# Altium PCB trailGuard.PcbDoc
Units mm, origin at the board's own origin, x right, y up, seen from the top; angles counter-clockwise.
Board outline 59.99 x 65.09 mm, 2 copper layers (Top Layer, Bottom Layer), stack 1.1 mm thick; 41 components, 36 nets, 159 pads, 55 vias.
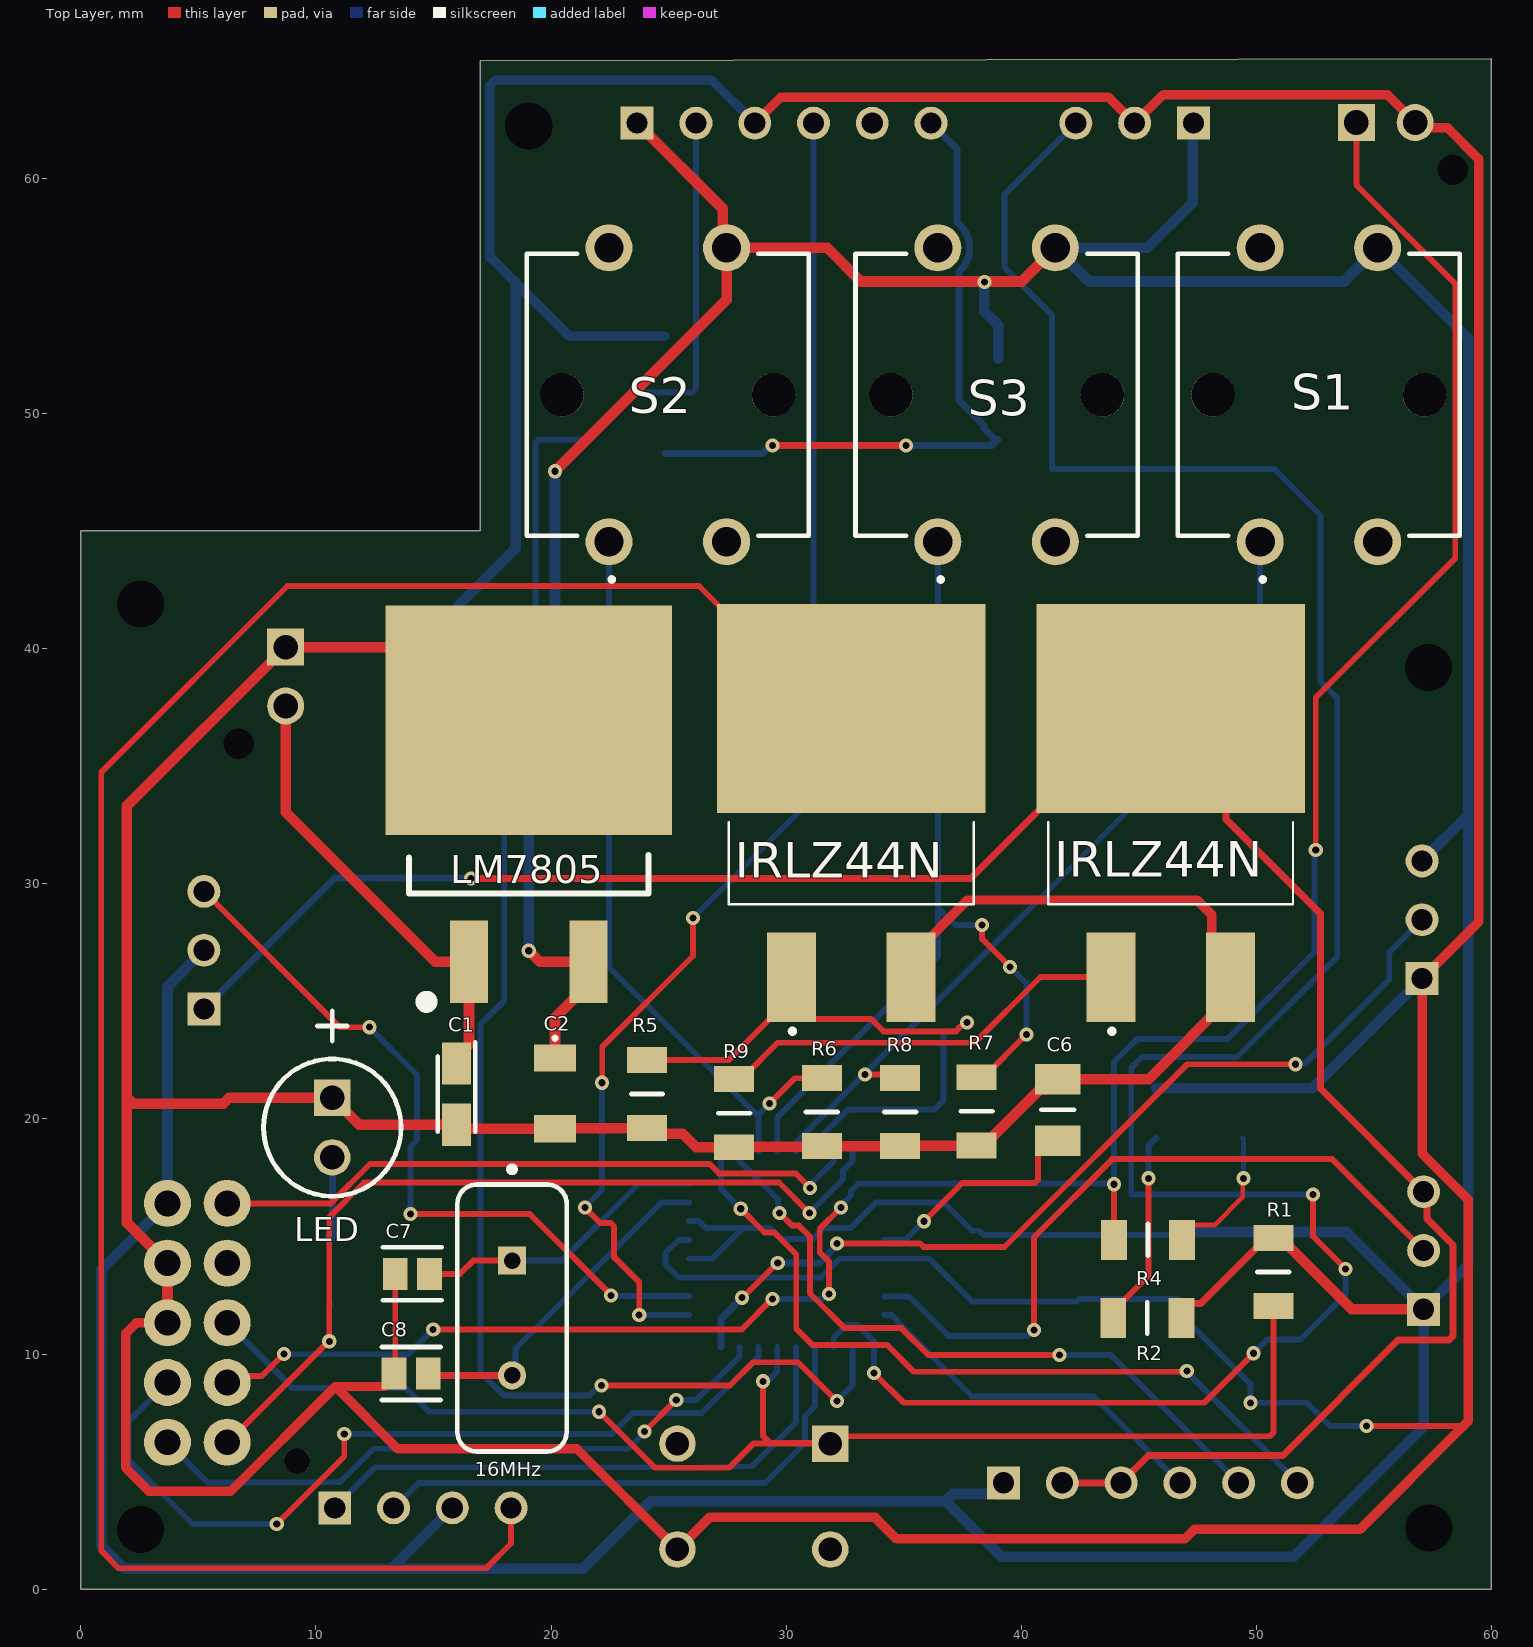
[diagram p0: Top Layer view]
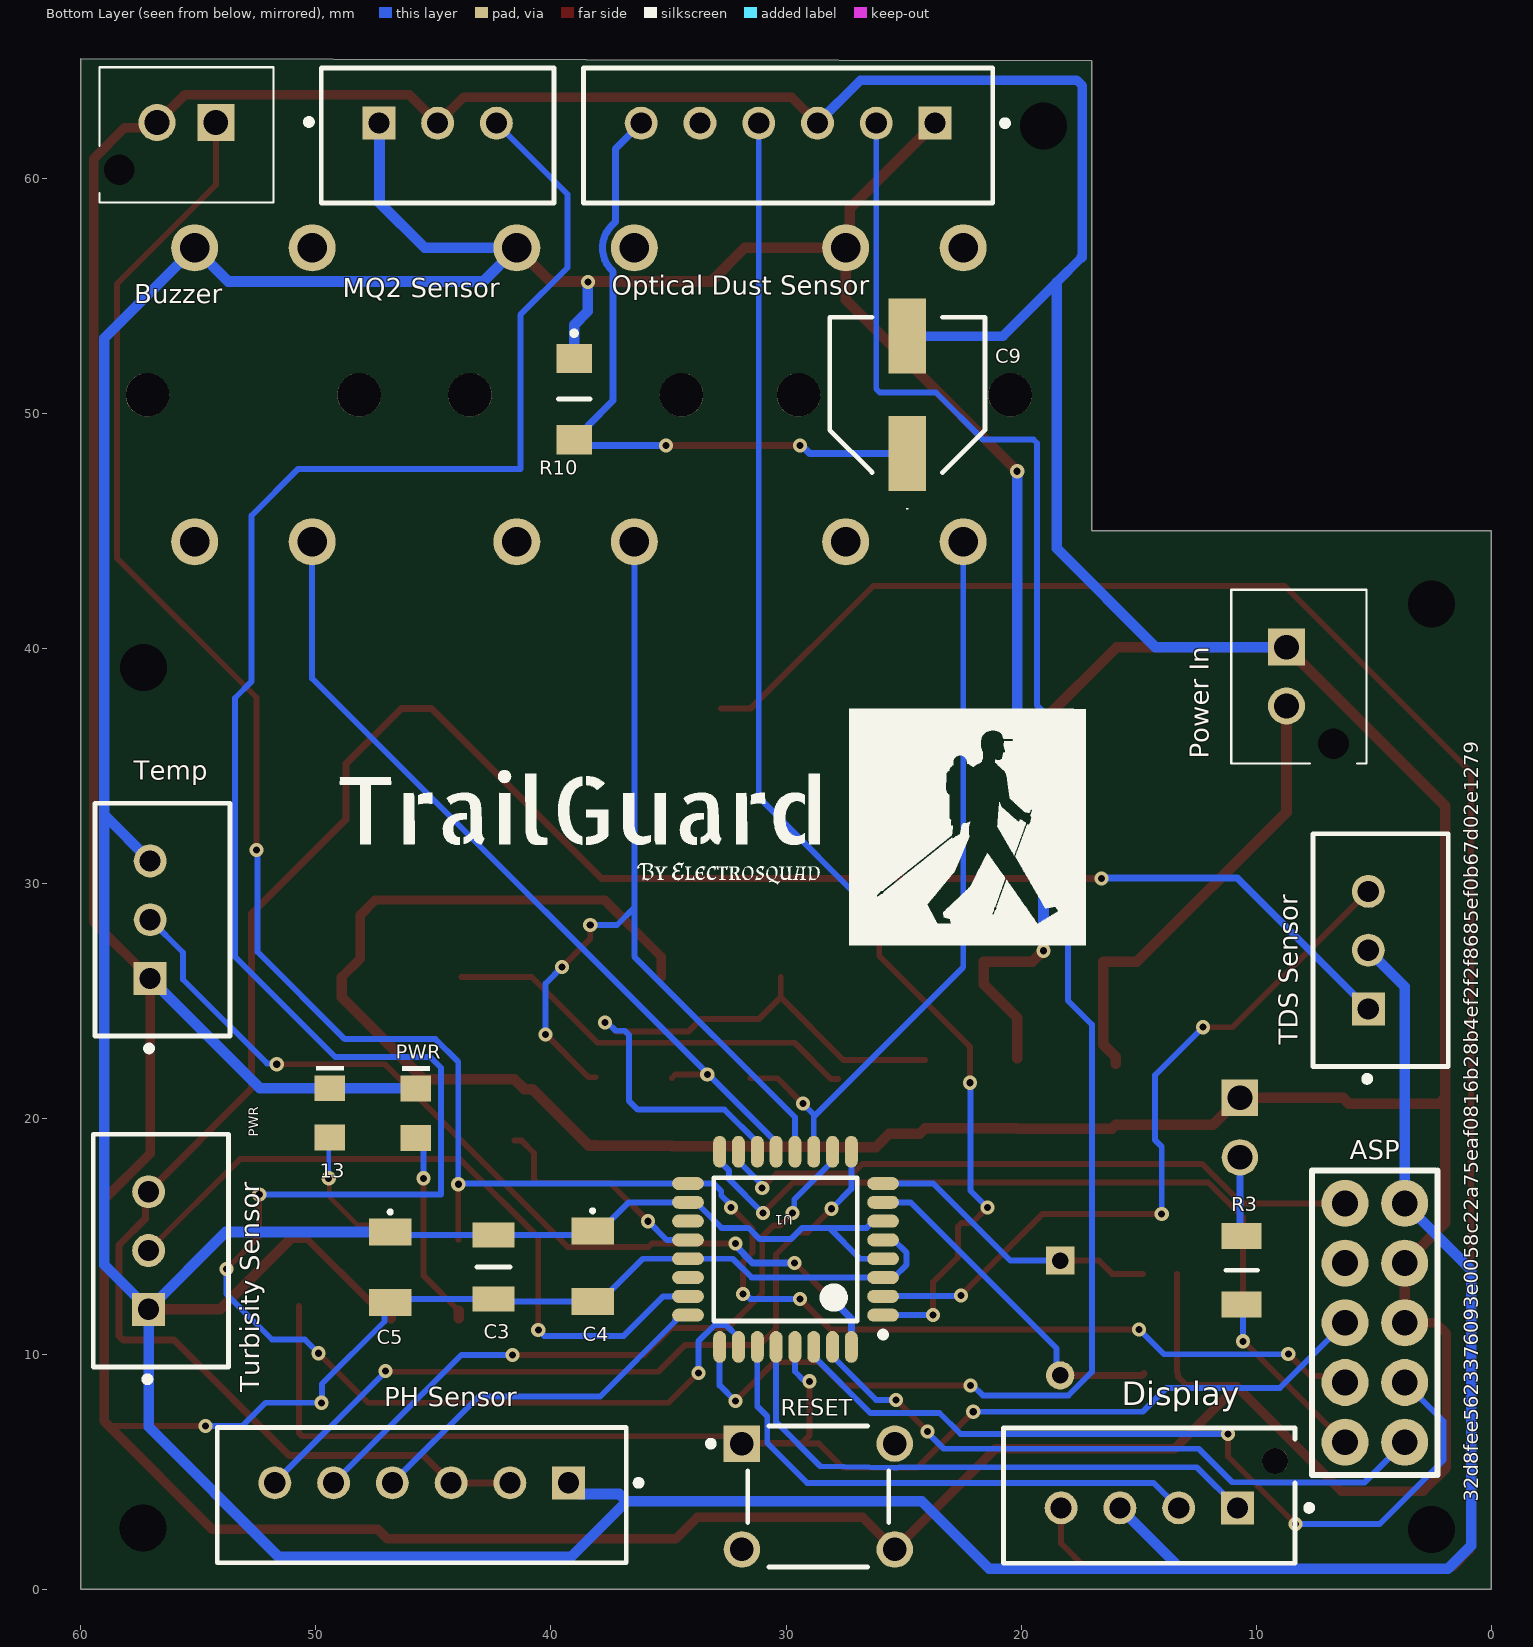
[diagram p1: Bottom Layer view, seen from below]
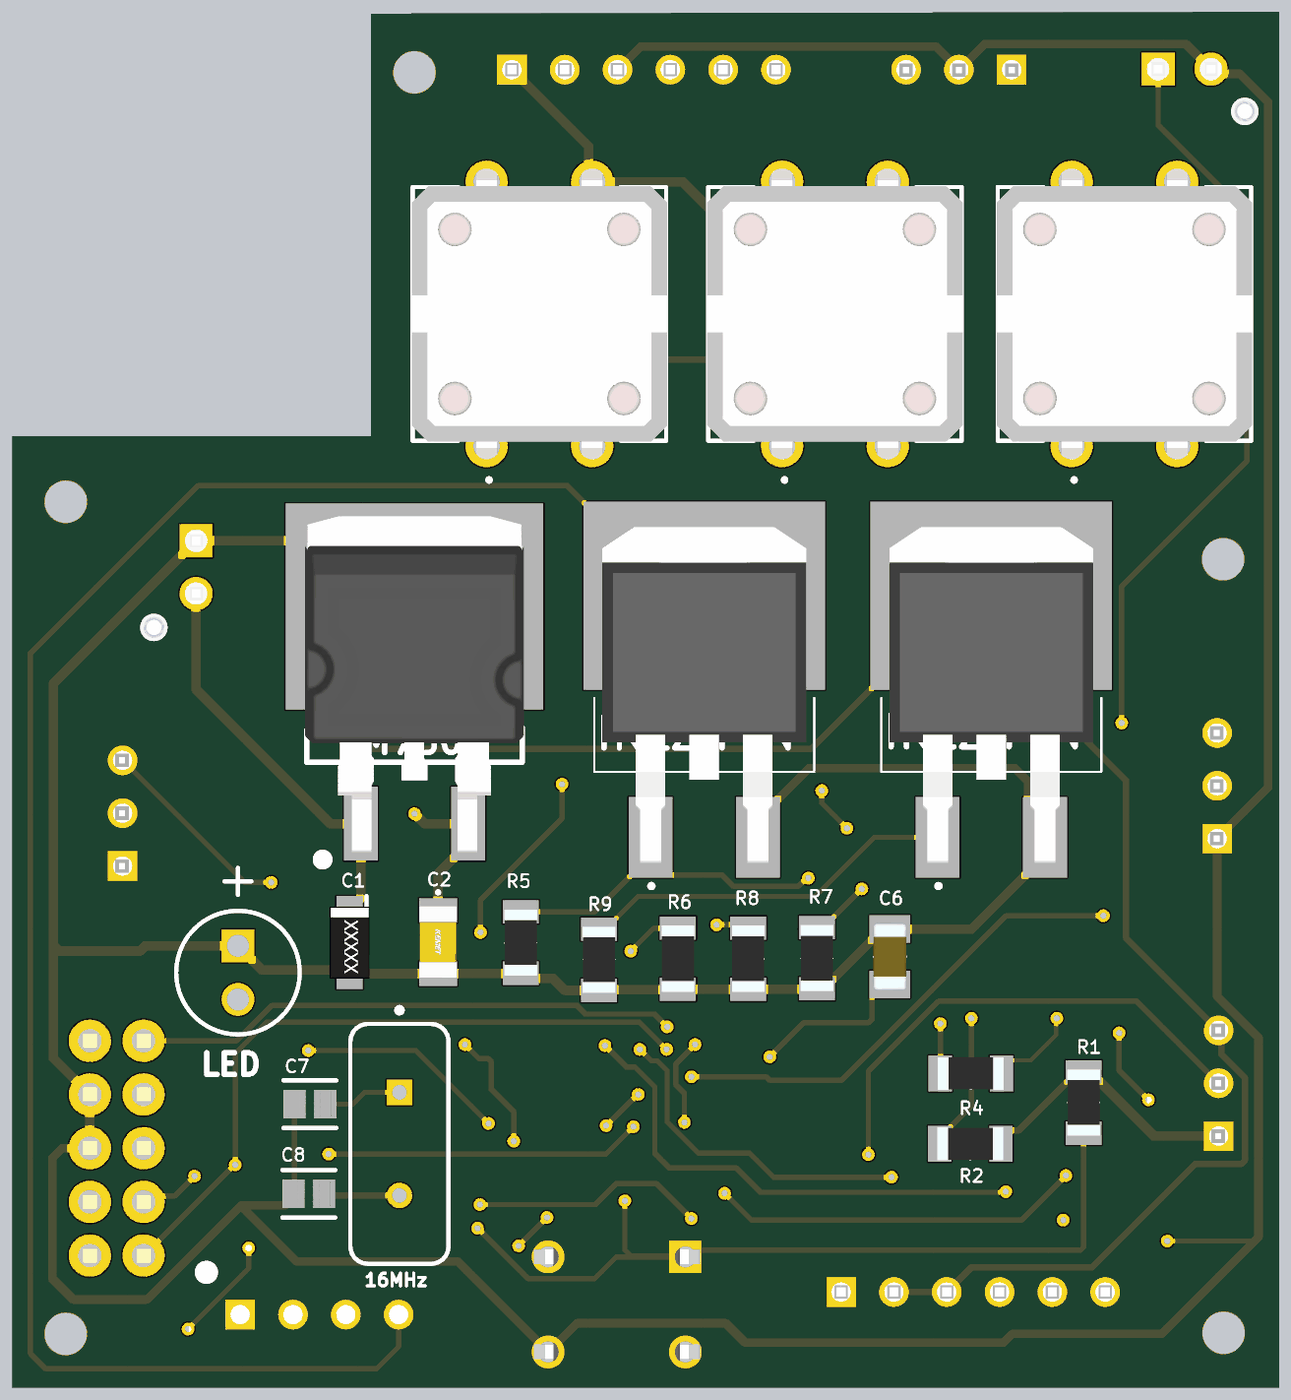
[diagram p2: 3D render of the assembled board from above, using the file's embedded part models]
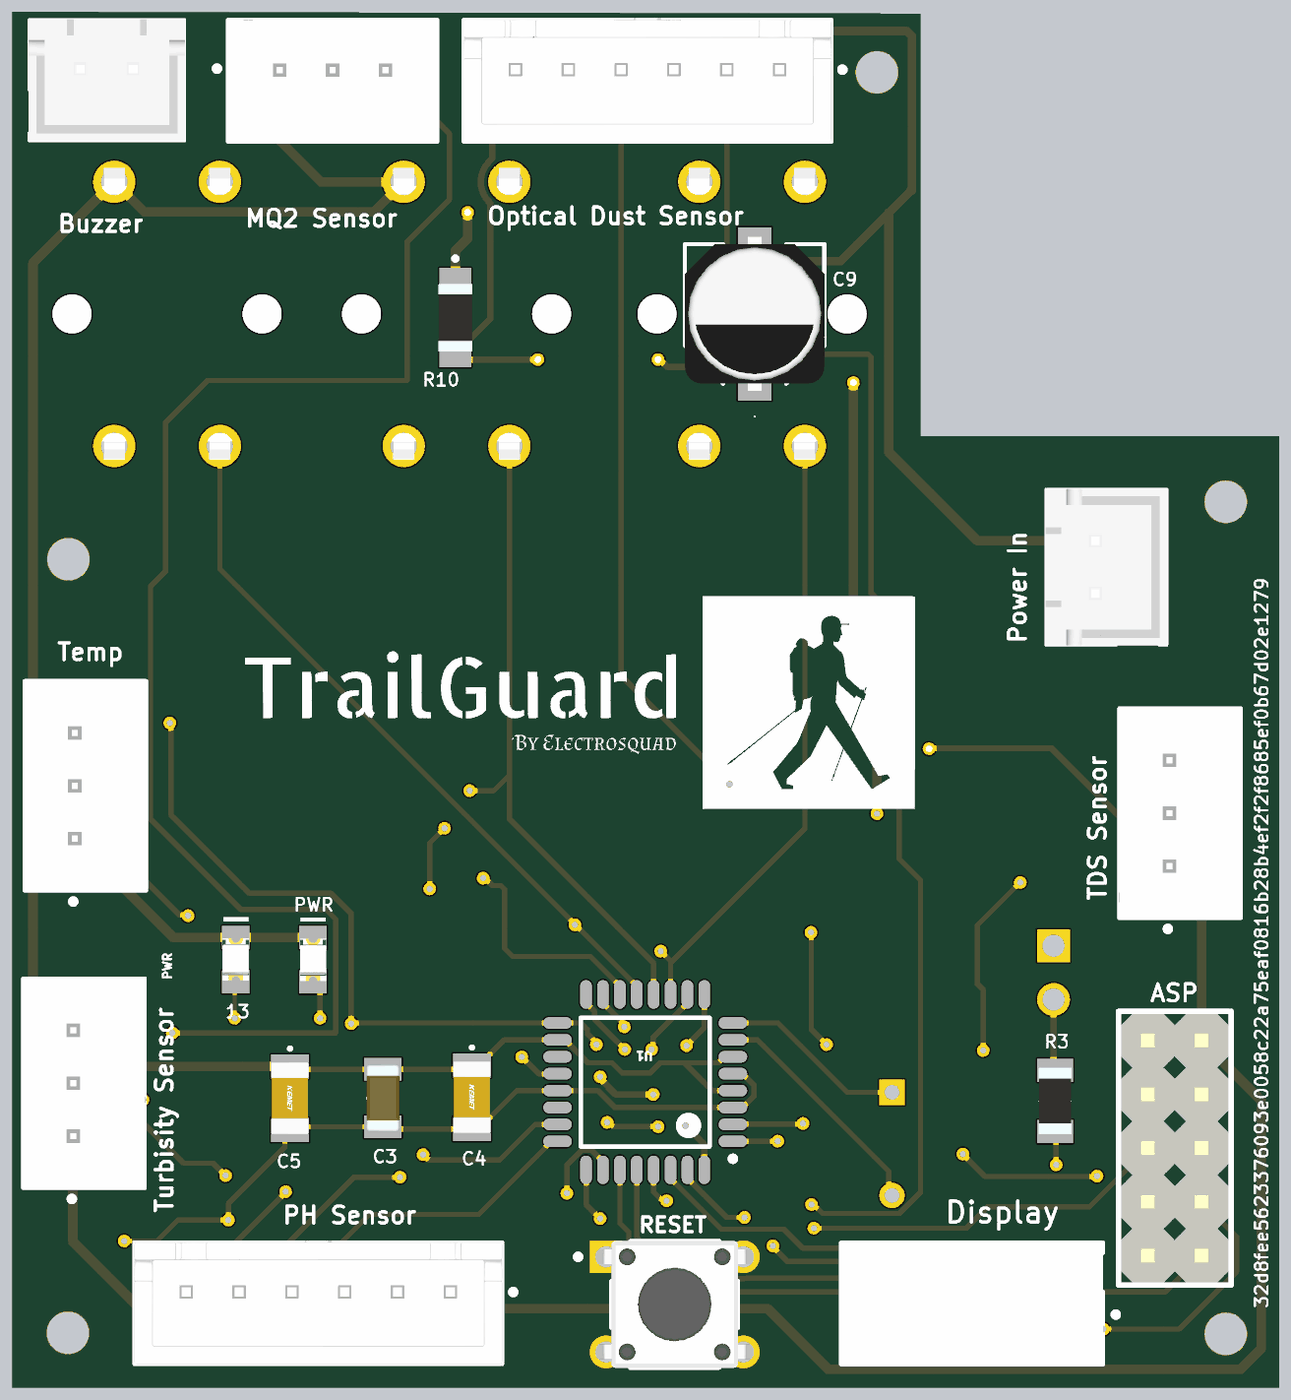
[diagram p3: 3D render of the assembled board from below, using the file's embedded part models]

## Layer stack, top to bottom
Top Solder: solder mask 0.05, Solder Resist, Dk 3.5
Top Layer: signal copper 0.1
Dielectric 1: dielectric 0.9, FR-4, Dk 4.8
Bottom Layer: signal copper 0.1
Bottom Solder: solder mask 0.05, Solder Resist, Dk 3.5

## Board outline
0,0 0,45.009 16.993,45.009 16.993,65.009 59.995,65.09 59.995,0

## Design rules (kind name [scope] priority, off if disabled: settings)
BoardOutlineClearance [All] p1: gap=0.2 ignorepadtopadclearanceinfootprint=FALSE
Clearance [All] p1: gap=0.127 ignorepadtopadclearanceinfootprint=FALSE except(0.25: Arc-Hole Track-Hole SMDPad-Hole THPad-Hole Via-Hole Fill-Hole Poly-Hole Region-Hole Text-Hole)
ComponentClearance [All] p1: gap=0.127 collisioncheckmode=3 verticalgap=0.127 showdistances=TRUE
DiffPairsRouting [All] p1: maxlimit=0.254 minlimit=0.127 mostfreqgap=0.127 toplayer_minwidth=0.127 toplayer_maxwidth=25.4 toplayer_prefwidth=0.127 bottomlayer_minwidth=0.127 bottomlayer_maxwidth=25.4 bottomlayer_prefwidth=0.127 maxuncoupledlength=12.7
Height [All] p1: minheight=0 maxheight=1816.048 prefheight=12.7
HoleSize [All] p1: absolutevalues=TRUE maxlimit=6.3 minlimit=0.3 maxpercent=80.000 minpercent=20.000
HoleToHoleClearance [All] p1: gap=0.25 allowstackedmicrovias=FALSE
MinimumAnnularRing [All] p1: minimumring=0.076
MinimumSolderMaskSliver [All] p1: minsoldermaskwidth=0
PlaneClearance [All] p1: clearance=0.127
PlaneConnect PlaneConnectPowerPads [InPadClass('PowerPads')] p1: planeconnectstyle=Direct reliefexpansion=0.508 reliefentries=4 reliefconductorwidth=0.254 reliefairgap=0.254
PlaneConnect [All] p2: pad.planeconnectstyle=Relief pad.reliefexpansion=0.3 pad.reliefentries=4 pad.reliefconductorwidth=0.127 pad.reliefairgap=0.127 via.planeconnectstyle=Direct via.reliefexpansion=0.3 via.reliefentries=4 via.reliefconductorwidth=0.127 via.reliefairgap=0.127
PolygonConnect PolygonConnectPowerPads [All vs (InPadClass('PowerPads'))] p1: connectstyle=Direct reliefconductorwidth=0.254 reliefentries=4 polygonreliefangle="90 Angle" airgapwidth=0.254
PolygonConnect [All] p2: thpad.connectstyle=Relief thpad.reliefconductorwidth=0.127 thpad.reliefentries=4 thpad.polygonreliefangle="90 Angle" thpad.airgapwidth=0.127 smdpad.connectstyle=Relief smdpad.reliefconductorwidth=0.127 smdpad.reliefentries=4 smdpad.polygonreliefangle="90 Angle" smdpad.airgapwidth=0.127 via.connectstyle=Direct via.reliefconductorwidth=0.127 via.reliefentries=4 via.polygonreliefangle="90 Angle" via.airgapwidth=0.127
RoutingVias [All] p1: holewidth=0.3 width=0.6 viastyle="Through Hole" minholewidth=0.3 minwidth=0.6 maxholewidth=0.6 maxwidth=6.6
SilkToSilkClearance [All] p1: silktosilkclearance=0
SilkToSolderMaskClearance [IsPad] p1: minsilkscreentomaskgap=0.07 clearancetoexposedcopper=TRUE
SolderMaskExpansion [All] p1: expansion=0.075 istentingtop=FALSE
Width [All] p1: maxlimit=25.4 minlimit=0.127 preferedwidth=0.127 minimp=50.000000 maximp=50.000000 favimp=50.000000
20 further rules are at their usual default settings.

## Components (designator, comment, footprint, x,y, rotation, side; value= is the part's Value field where it differs from the comment)
13 "Red LED" WL-SMCW_0805_150080xx75000 49.403,20.252 r270 bottom (schematic designator D4)
16MHz "16MHz" FOX-FOXSLF160-20 18.339,11.532 r270 top (schematic designator Y1)
ASP "2R10PIN Headers" "2R10PIN Headers" 6.223,6.248 r180 bottom (schematic designator H1)
Buzzer "Buzzer" B2BXHAMLFSN 54.254,62.382 r0 bottom (schematic designator J5)
C1 "0.33uf" CAPPM3216X180N 15.977,21.057 r270 top
C2 "0.1uf" C1206 20.168,21.082 r270 top
C3 "4.7uf 16v" CAPC3216X180N 42.443,13.702 r90 bottom
C4 "1uf" C1206 38.227,13.741 r270 bottom
C5 "1uf" C1206 46.838,13.691 r270 bottom
C6 "100nF" CAPC3216X190N 41.554,20.385 r270 top
C7 "22pF" FP-CL21-IPC_C 14.097,13.411 r0 top
C8 "22pf" FP-CL21-IPC_C 14.046,9.169 r180 top
C9 "220uf 16v" EEE0JA331XP 24.841,50.8 r90 bottom
Display "Displays" FP-B4B-XH-AM_LF_SN-MFG 14.549,3.979 r180 bottom (schematic designator J12)
IRLZ44N "IRLZ44NSTRLPBF" IRF2804STRLPBF 46.355,30.785 r0 top (schematic designator Q2)
IRLZ44N "IRLZ44NSTRLPBF" IRF2804STRLPBF 32.766,30.785 r0 top (schematic designator Q1)
LED "HLMP-3301" AVAG-HLMP-3301-2 10.693,20.904 r270 top (schematic designator DS1)
LM7805 "L7805ABD2T-TR" D2PAK-STB35NF10T4 24.15,29.586 r270 top (schematic designator IC1)
"MQ2 Sensor" "B3B-XH-A(LF)(SN)" FP-B3B-XH-A_LF_SN-MFG 44.82,61.832 r180 bottom (schematic designator J11)
"Optical Dust Sensor" "B6B-XH-A(LF)(SN)" FP-B6B-XH-A_LF_SN-MFG 29.912,61.832 r0 bottom (schematic designator J7)
"PH Sensor" "B6B-XH-A(LF)(SN)" FP-B6B-XH-A_LF_SN-MFG 45.497,3.996 r0 bottom (schematic designator J8)
"Power In" "BoostCnvOut" B2BXHAMLFSN 8.712,40.067 r270 bottom (schematic designator J2)
PWR "Green" WL-SMCW_0805_150080xx75000 45.745,20.244 r270 bottom (schematic designator D1)
R1 "10k 5%" RESC3116X70N 50.724,13.49 r90 top
R2 "1k 5%" RESC3116X70N 45.364,11.532 r180 top
R3 "1k 5%" RESC3116X70N 10.617,13.564 r270 bottom
R4 "1k 5%" RESC3116X70N 45.388,14.859 r0 top
R5 "10k 5%" RESC3116X70N 24.079,21.057 r90 top
R6 "10k 5%" RESC3116X70N 31.521,20.295 r90 top
R7 "10k 5%" RESC3116X70N 38.1,20.32 r90 top
R8 "10k 5%" RESC3116X70N 34.849,20.295 r90 top
R9 "10k 5%" RESC3116X70N 27.788,20.244 r90 top
R10 "150 1%" ERJ8ENF1000V 39.014,50.622 r270 bottom
RESET "MJTP1230A" FP-MJTP1230A-MFG 28.626,3.937 r180 bottom (schematic designator SW1)
S1 "B3F-5050" B3F-4055 52.658,50.8 r270 top
S2 "B3F-5050" B3F-4055 24.964,50.8 r270 top
S3 "B3F-5050" B3F-4055 38.953,50.8 r270 top
"TDS Sensor" "B3B-XH-A(LF)(SN)" FP-B3B-XH-A_LF_SN-MFG 4.707,27.178 r90 bottom (schematic designator J6)
Temp "B3B-XH-A(LF)(SN)" FP-B3B-XH-A_LF_SN-MFG 56.523,28.473 r90 bottom (schematic designator J9)
"Turbisity Sensor" "B3B-XH-A(LF)(SN)" FP-B3B-XH-A_LF_SN-MFG 56.591,14.402 r90 bottom (schematic designator J10)
U1 "ATmega328-AUR" 32A_L 30.023,14.453 r0 bottom

## Footprints (in the part's own frame and the unit in brackets; to place one, negate y for a bottom-side part, rotate by r counter-clockwise, add the part's x,y. Pads: shape width x height; smd on the part's side, far side on the other; paste and mask are expansions set on the pad)
"2R10PIN Headers" [mm]
  round 2 hole 1.1: 1(0,10.16) 2(0,7.62) 3(0,5.08) 4(0,2.54) 5(0,0) 6(2.54,10.16) 7(2.54,7.62) 8(2.54,5.08) 9(2.54,2.54) 10(2.54,0)
  silkscreen extent -1.4,-1.4 3.94,11.56, body extent -1.27,-1.27 3.81,11.43, height 8.54
32A_L [mm] "Thin QFP, 32-Leads, Body 7x7mm, Pitch 0.8mm, IPC High Density"
  oval 1.35x0.55 smd: 1(-4.15,2.8) 2(-4.15,2) 3(-4.15,1.2) 4(-4.15,0.4) 5(-4.15,-0.4) 6(-4.15,-1.2) 7(-4.15,-2) 8(-4.15,-2.8) 17(4.15,-2.8) 18(4.15,-2) 19(4.15,-1.2) 20(4.15,-0.4) 21(4.15,0.4) 22(4.15,1.2) 23(4.15,2) 24(4.15,2.8)
  oval 0.55x1.35 smd: 9(-2.8,-4.15) 10(-2,-4.15) 11(-1.2,-4.15) 12(-0.4,-4.15) 13(0.4,-4.15) 14(1.2,-4.15) 15(2,-4.15) 16(2.8,-4.15) 25(2.8,4.15) 26(2,4.15) 27(1.2,4.15) 28(0.4,4.15) 29(-0.4,4.15) 30(-1.2,4.15) 31(-2,4.15) 32(-2.8,4.15)
  silkscreen extent -4.27,-3.05 3.05,3.75, body extent -3.5,-3.5 3.5,3.5, height 1.2
AVAG-HLMP-3301-2 [mm] "THD, 2-Leads, Body Dia 5.85mm"
  rect 1.55x1.55 hole 1.05: 1(0,0)
  round 1.55 hole 1.05: 2(2.54,0)
  silkscreen extent -3.68,-2.92 4.19,2.92
B2BXHAMLFSN [mm]
  rect 1.575x1.575 hole 1.05: 1(0,0)
  round 1.575 hole 1.05: 2(2.5,0)
  round 0.65 hole 1.3 unplated: MH1(4.1,2)
  silkscreen extent -2.45,-2.35 4.95,3.4, body extent -2.45,-2.36 4.95,3.39, height 6.9
B3F-4055 [mm]
  round 2 hole 1.25: 1(6.25,-2.5) 2(-6.25,-2.5) 3(6.25,2.5) 4(-6.25,2.5)
  round 1.85 hole 1.85 unplated: 5(0,4.5) 6(0,-4.5)
  silkscreen extent -6,-6 7.94,6, body extent -6.9,-6.05 6.9,6.05, height 7.3
C1206 [mm]
  rect 1.15x1.8 smd: 1(-1.5,0) 2(1.5,0)
  silkscreen extent -2.4,-0.05 -2.3,0.05, body extent -1.7,-0.9 1.7,0.9, height 1.75
CAPC3216X180N [mm]
  rect 1.07x1.78 smd: 1(-1.36,0) 2(1.36,0)
  silkscreen extent 0,-0.7 0,0.7, body extent -1.6,-0.8 1.6,0.8, height 1.8
CAPC3216X190N [mm]
  rect 1.3x1.92 smd: 1(-1.31,0) 2(1.31,0)
  silkscreen extent 0,-0.7 0,0.7, body extent -1.6,-0.8 1.6,0.8, height 1.9
CAPPM3216X180N [mm]
  rect 1.8x1.25 smd: 1(-1.3,0) 2(1.3,0)
  silkscreen extent -2.2,-0.8 1.6,0.8, body extent -1.7,-0.95 1.7,0.95, height 1.83
D2PAK-STB35NF10T4 [mm]
  rect 3.5x1.6 smd: 1(2.904,-7.64) 3(2.904,-2.56)
  rect 9.75x12.2 smd: 4(-7.371,-5.1)
  silkscreen extent -1.64,-10.2 4.82,0, body extent -11.64,-10.28 4.25,0.08, height 4.6
EEE0JA331XP [mm]
  rect 3.2x1.6 smd: 1(-2.5,0) 2(2.5,0)
  silkscreen extent -4.88,-3.3 3.3,3.3, body extent -3.65,-3.3 3.65,3.3, height 7.7
ERJ8ENF1000V [mm]
  rect 1.25x1.5 smd: 1(-1.725,0) 2(1.725,0)
  silkscreen extent -2.9,-0.67 0,0.67, body extent -1.6,-0.8 1.6,0.8, height 0.6
FOX-FOXSLF160-20 [mm] "THD, 2-Leads, Body 11.35x4.65mm"
  rect 1.2x1.2 hole 0.7: 1(-2.44,0)
  round 1.2 hole 0.7: 2(2.44,0)
  silkscreen extent -6.45,-2.33 5.68,2.33, body extent -5.67,-2.32 5.68,2.33, height 3.6
FP-B3B-XH-A_LF_SN-MFG [mm]
  rect 1.4x1.4 hole 0.9 paste-2539.97 mask+0: 1(-2.5,0.525)
  round 1.4 hole 0.9 paste-2539.97 mask+0: 2(0,0.525) 3(2.5,0.525)
  silkscreen extent -5.6,-2.87 4.95,2.88, body extent -4.95,-2.88 4.95,2.89, height 7
FP-B4B-XH-AM_LF_SN-MFG [mm]
  rect 1.4x1.4 hole 0.9 paste-2539.97 mask+0: 1(3.75,-0.525)
  round 1.4 hole 0.9 paste-2539.97 mask+0: 2(1.25,-0.525) 3(-1.25,-0.525) 4(-3.75,-0.525)
  round 1.1 hole 1.1 unplated paste-2539.97 mask+0: ""(5.35,1.475)
  silkscreen extent -6.2,-2.88 6.92,2.87, body extent -6.2,-2.9 6.2,2.86, height 7
FP-B6B-XH-A_LF_SN-MFG [mm]
  rect 1.4x1.4 hole 0.9 paste-2539.97 mask+0: 1(-6.25,-0.525)
  round 1.4 hole 0.9 paste-2539.97 mask+0: 2(-3.75,-0.525) 3(-1.25,-0.525) 4(1.25,-0.525) 5(3.75,-0.525) 6(6.25,-0.525)
  silkscreen extent -9.35,-2.88 8.7,2.87, body extent -8.7,-2.98 8.7,2.88, height 7
FP-CL21-IPC_C [mm]
  rect 1.055x1.356 smd paste+0 mask+0: 1(-0.726,0) 2(0.726,0)
  silkscreen extent -1.25,-1.13 1.25,1.13, body extent -1,-0.63 1,0.63, height 1.45
FP-MJTP1230A-MFG [mm]
  rect 1.55x1.55 hole 1 paste-2539.97 mask+0: 1(-3.25,2.25)
  round 1.55 hole 1 paste-2539.97 mask+0: 2(3.25,2.25) 3(-3.25,-2.25) 4(3.25,-2.25)
  silkscreen extent -4.7,-3 3,3, body extent -3.93,-3 3.93,3, height 5
IRF2804STRLPBF [mm]
  rect 2.08x3.81 smd: 1(-2.54,-4.75) 3(2.54,-4.75)
  rect 11.43x8.89 smd: 2(0,6.68)
  silkscreen extent -5.21,-7.15 5.21,1.85, body extent -4.82,-5.95 4.82,9.92, height 4.19
RESC3116X70N [mm]
  rect 1.1x1.7 smd: 1(-1.45,0) 2(1.45,0)
  silkscreen extent 0,-0.67 0,0.67, body extent -1.56,-0.77 1.56,0.77, height 0.7
WL-SMCW_0805_150080xx75000 [mm] "SMD Mono-color Chip LED, body 2.0x1.25mm"
  rect 1.1x1.3 smd: 1(-1.05,0) 2(1.05,0)
  silkscreen extent -2,-0.6 -1.8,0.6, body extent -1,-0.63 1,0.62, height 0.7

## Part data
13: library part CMP-1426-00011-2, Case Code (Imperial)=0805, Case Code (Metric)=2012, Color=Red, Forward Current=100mA, Forward Voltage=2V, Max Operating Temperature=85°C, Max Reverse Voltage (DC)=5V, Min Operating Temperature=-40°C, Test Current=20mA, Case/Package=0805, Dominant Wavelength=625nm, Height=700µm, Length=2mm, Lens Style="Clear, Rectangular", Luminous Intensity=150mcd, Mount="Surface Mount", NexarPartId=29717781, Packaging="Tape and Reel", Peak Wavelength=630nm, REACH SVHC=Unknown, RoHS=Compliant, Viewing Angle=140°, Wavelength=625nm, Width=1.25mm
16MHz: library part CMP-1749-00003-1, "Resistance Weld Thru-Hole Crystal, 16 MHz, -20 to 70 degC, 2-Pin THD, RoHS, Bulk", Case\Package=Axial, Max Operating Temperature="155 degC", Min Operating Temperature="-55 degC", Package Quantity=200, Power Rating="250 mW", Resistance="221 kohm", Tolerance=1%, Voltage Rating="250 V", ComponentLink1Description="Manufacturer URL", ComponentLink1URL=http://www.foxonline.com/, ComponentLink2Description=Datasheet, ComponentLink2URL=http://www.foxonline.com/pdfs/hc49slf.pdf, DatasheetVersion=Mar-15, Length="0.248 inch", Mount="Through Hole", PackageDescription="2-Pin Through Hole Device, Body 11.35 x 4.65 mm", PackageReference=FOXSLF160-20, Packaging=Bulk, RoHSCompliant=true
ASP: "PCB Mount Header, Vertical, Board-to-Board, 10 Position, 2.54 mm [.1 in] Centerline, Breakaway, Tin, Through Hole - Solder, Signal, AMPMODU Headers"
Buzzer "Power In": library part B2B-XH-AM_LF__SN_, "Connector", Arrow Part Number=B2B-XH-AM(LF)(SN), Manufacturer_Name="JST (JAPAN SOLDERLESS TERMINALS)", Arrow Price/Stock=https://www.arrow.com/en/products/b2b-xh-am-lf-sn/jst-manufacturing?region=europe, Datasheet Link=https://www.jst-mfg.com/product/pdf/eng/eXH.pdf, Height=7mm, Manufacturer_Part_Number=B2B-XH-AM(LF)(SN)
C1: library part 293D334X9035A2TE3, "Capacitor Polarised", Manufacturer_Name=Vishay, Mouser Part Number=74-293D334X9035A2TE3, Datasheet Link=http://www.vishay.com/docs/40002/293d.pdf, Height=1.8mm, Manufacturer_Part_Number=293D334X9035A2TE3, Mouser Price/Stock=https://www.mouser.co.uk/ProductDetail/Vishay-Sprague/293D334X9035A2TE3?qs=CH3Q5FKf4qBLTGJb7uLzfw%3D%3D
C2 C4 C5: library part C1206C105K5RECTU, "Capacitor", Manufacturer_Name=KEMET, Mouser Part Number=80-C1206C105K5RECTU, Arrow Part Number=C1206C105K5RECTU, Arrow Price/Stock=https://www.arrow.com/en/products/c1206c105k5rectu/kemet-corporation, Datasheet Link=https://content.kemet.com/datasheets/KEM_C1090_X7R_ESD.pdf, Manufacturer_Part_Number=C1206C105K5RECTU, Mouser Price/Stock=https://www.mouser.co.uk/ProductDetail/KEMET/C1206C105K5RECTU?qs=55YtniHzbhAmzHye57%2FAnw%3D%3D
C3: library part EMK316B7475KL-T, "Capacitor", Manufacturer_Name="TAIYO YUDEN", Mouser Part Number=963-EMK316B7475KL-T, Datasheet Link=https://componentsearchengine.com/Datasheets/2/EMK316B7475KL-T.pdf, Height=1.8mm, Manufacturer_Part_Number=EMK316B7475KL-T, Mouser Price/Stock=http://www.mouser.com/Search/ProductDetail.aspx?qs=I6KAKw0tg2xhDY35w16PKg%3d%3d
C6: library part MCJCU31LBB7104KTPA01, "Capacitor", Manufacturer_Name="TAIYO YUDEN", Mouser Part Number=963-MCJCU31LBB7104KT, Datasheet Link=https://ds.yuden.co.jp/TYCOMPAS/ap/specSheet?pn=MCJCU31LBB7104KTPA01, Height=1.9mm, Manufacturer_Part_Number=MCJCU31LBB7104KTPA01, Mouser Price/Stock=https://www.mouser.co.uk/ProductDetail/TAIYO-YUDEN/MCJCU31LBB7104KTPA01?qs=tlsG%2FOw5FFgiqRcQEEePOw%3D%3D
C7: library part CMP-13271-000195-1, "CL21 Series 0805 22pF 50V ±5% Tolerance C0G Multilayer Ceramic Chip Capacitor", Case Code (Imperial)=0805, Case Code (Metric)=2012, Dielectric=C0G, Max Operating Temperature=125°C, Min Operating Temperature=-55°C, Package Quantity=1, Ratings=AEC-Q200, Tolerance=5%, Voltage Rating=50V, Capacitance=22pF, Case/Package=0805, Depth=1.25mm, Height=0.6mm, Length=2mm, Mount="Surface Mount", Packaging="Tape and Reel", Radiation Hardening=No, Thickness=0.028inch, Width=0.049inch
C8: library part CMP-13271-000195-1, "CL21 Series 0805 22pF 50V ±5% Tolerance C0G Multilayer Ceramic Chip Capacitor", Capacitance=22pF, Case Code (Imperial)=0805, Case Code (Metric)=2012, Dielectric=C0G, Max Operating Temperature=125°C, Min Operating Temperature=-55°C, Package Quantity=1, Ratings=AEC-Q200, Tolerance=5%, Voltage Rating=50V, Case/Package=0805, Depth=1.25mm, Height=0.6mm, Length=2mm, Mount="Surface Mount", Packaging="Tape and Reel", Radiation Hardening=No, Thickness=0.028inch, Width=0.049inch
C9: library part EEE-FTE221XAP, "Capacitor Polarised", Manufacturer_Name=Panasonic, Mouser Part Number=667-EEE-FTE221XAP, Arrow Part Number=EEE-FTE221XAP, Arrow Price/Stock=https://www.arrow.com/en/products/eeefte221xap/panasonic?region=nac, Datasheet Link=http://industrial.panasonic.com/cdbs/www-data/pdf/RDE0000/ABA0000C1240.pdf, Height=7.8mm, Manufacturer_Part_Number=EEE-FTE221XAP, Mouser Price/Stock=https://www.mouser.co.uk/ProductDetail/Panasonic/EEE-FTE221XAP?qs=CMJjuEs1%252BuHWDEFaun6NQg%3D%3D
Display: library part CMP-17439-000301-1, "CONN HEADER VERT 4POS 2.5MM"
IRLZ44N IRLZ44N: "MOSFET (N-Channel)", Manufacturer_Name=Infineon, Mouser Part Number=942-IRLZ44NSTRLPBF, Arrow Part Number=IRLZ44NSTRLPBF, Arrow Price/Stock=https://www.arrow.com/en/products/irlz44nstrlpbf/infineon-technologies-ag?region=nac, Datasheet Link=https://www.infineon.com/dgdl/irlz44nspbf.pdf?fileId=5546d462533600a40153567221272727, Height=4.83mm, Manufacturer_Part_Number=IRLZ44NSTRLPBF, Mouser Price/Stock=https://www.mouser.co.uk/ProductDetail/Infineon-Technologies/IRLZ44NSTRLPBF?qs=9%252BKlkBgLFf1LijFJvUznEg%3D%3D
LED: library part CMP-2000-06411-1, "T-1 3/4 (5 mm) Diffused LED Lamp, 1.9 V, -40 to 100 degC, 2-Pin THD, RoHS, Bulk", Emitting Color=Red, Forward Current=25mA, Forward Voltage=2.4V, Manufacturer=Avago, Operating Temp Range=-40Cto100C, Operating Temperature Classification=Industrial, Package Description="2-Pin Through Hole LED, Dia 5.85 mm", Package Type=T-13/4, Power Dissipation=85W, Reverse Voltage=5V, Test Current (It)=10mA, Chip Material=GaP, Datasheet URL=http://www.avagotech.com/docs/AV02-1558EN, Datasheet Version=03/2015, DELETED=Compliant, Dominant Wave Length=626nm, High Brightness=No, Lens Dimensions=5.08x5.08x8.3mm, Lens Type=ColoredDiffused, Lum Intensity=5.4mcd, Luminous Intensity=5.4mcd, Main Category=StandardLED, Manufacturer URL=http://www.avagotech.com/, Mounting=ThroughHole, Mounting Technology=ThroughHole, Number of  Elements=1, Package Reference=HLMP-3301, Packaging=TapeandReel, Peak Wavelength=635nm, Pin Count=2, Product Depth (mm)=6.1mm, Product Height (mm)=9.19mm, Product Length (mm)=6.1mm, Rad Hardened=No, Shape Type=Circular, Type=Uni-Color, Viewing Angle=60deg
LM7805: "Integrated Circuit", Manufacturer_Name=STMicroelectronics, Mouser Part Number=511-L7805ABD2T-TR, Arrow Part Number=L7805ABD2T-TR, Arrow Price/Stock=https://www.arrow.com/en/products/l7805abd2t-tr/stmicroelectronics?region=nac, Datasheet Link=https://www.st.com/resource/en/datasheet/l78.pdf, Manufacturer_Part_Number=L7805ABD2T-TR, Mouser Price/Stock=https://www.mouser.co.uk/ProductDetail/STMicroelectronics/L7805ABD2T-TR?qs=LL%252BsqOK9SqOQ%2FfZD5ZsNqA%3D%3D
"MQ2 Sensor" "TDS Sensor" Temp "Turbisity Sensor": library part CMP-17439-000014-3, "CONN HEADER VERT 3POS 2.5MM", Color=Natural, Contact Resistance=20mR, Current Rating=3A, Flammability Rating="UL94 V-0", Housing Color=White, Insulation Resistance=1GR, Max Operating Temperature=85°C, Max Voltage Rating (AC)=250V, Min Operating Temperature=-25°C, Connector Type=Header, Contact Finish - Mating=TIN, Contact Material=Brass, Contact Plating=Tin, Contact Shape=Square, Contact Type="Male Pin", Depth=5.75mm, Fastening Type=Detent, Gender=Male, Housing Material=Polyamide, Insulation Color=Natural, Insulation Material=Nylon, Lead Free="Lead Free", Lead Pitch=2.5mm, Length=9.9mm, Max Current Rating=3A, Max Voltage Rating (DC)=250V, Mount="Through Hole", Number Of Contacts=3, Number of Positions=3, Number Of Rows=1, Orientation=Straight, Packaging=Bulk, Pitch=2.5mm, REACH SVHC="No SVHC", Series=XH, Termination=Solder, Voltage Rating=250V, Voltage Rating (AC)=250V, Wire/Cable Gauge=22AWG
"Optical Dust Sensor" "PH Sensor": library part CMP-17439-000076-1, "CONN HEADER VERT 6POS 2.5MM"
PWR: library part CMP-1426-00007-2, Case Code (Imperial)=0805, Case Code (Metric)=2012, Forward Current=100mA, Forward Voltage=3.2V, Max Junction Temperature (Tj)=95°C, Max Operating Temperature=85°C, Max Reverse Voltage (DC)=5V, Min Operating Temperature=-40°C, Power Dissipation=105mW, Test Current=20mA, Case/Package=0805, Color=Green, Dominant Wavelength=525nm, Height=700µm, Length=2mm, Lens Style="Clear, Rectangular", Luminous Intensity=450mcd, Mount="Surface Mount", NexarPartId=29717780, Packaging="Tape and Reel", Peak Wavelength=515nm, REACH SVHC=Unknown, Reverse Voltage=5V, RoHS=Compliant, Viewing Angle=140°, Wavelength=520nm, Width=1.25mm
R1 R5 R6 R7 R8 R9: library part ERJ-8GEYJ103V, "Resistor", Manufacturer_Name=Panasonic, Mouser Part Number=667-ERJ-8GEYJ103V, Arrow Part Number=ERJ-8GEYJ103V, Arrow Price/Stock=https://www.arrow.com/en/products/erj-8geyj103v/panasonic?region=nac, Datasheet Link=https://4donline.ihs.com/images/VipMasterIC/IC/PANA/PANA-S-A0009891627/PANA-S-A0009891627-1.pdf?hkey=52A5661711E402568146F3353EA87419, Height=0.7mm, Manufacturer_Part_Number=ERJ-8GEYJ103V, Mouser Price/Stock=https://www.mouser.co.uk/ProductDetail/Panasonic/ERJ-8GEYJ103V?qs=IZrxGxQQvkNYuW0TYiASIA%3D%3D
R2 R3 R4: library part ERJ-T08J102V, "Resistor", Manufacturer_Name=Panasonic, Mouser Part Number=667-ERJ-T08J102V, Arrow Part Number=ERJ-T08J102V, Arrow Price/Stock=https://www.arrow.com/en/products/erj-t08j102v/panasonic?region=nac, Datasheet Link=https://datasheet.datasheetarchive.com/originals/distributors/Datasheets_SAMA/36012e4a716ec4a09ea551adc0f8ad50.pdf, Height=0.7mm, Manufacturer_Part_Number=ERJ-T08J102V, Mouser Price/Stock=https://www.mouser.co.uk/ProductDetail/Panasonic/ERJ-T08J102V?qs=iIVTEDlrHA1ZEpy1PD9K4g%3D%3D
R10: library part ERJ-8ENF1500V, "Resistor", Manufacturer_Name=Panasonic, Mouser Part Number=667-ERJ-8ENF1500V, Arrow Part Number=ERJ-8ENF1500V, Arrow Price/Stock=https://www.arrow.com/en/products/erj-8enf1500v/panasonic?region=nac, Datasheet Link=https://industrial.panasonic.com/cdbs/www-data/pdf/RDA0000/AOA0000C86.pdf, Height=0.7mm, Manufacturer_Part_Number=ERJ-8ENF1500V, Mouser Price/Stock=https://www.mouser.co.uk/ProductDetail/Panasonic/ERJ-8ENF1500V?qs=JjxTDIFmKPTW8QBP1YAtHw%3D%3D
RESET: library part CMP-47024-000004-1, "SWITCH TACTILE SPST-NO 0.05A 12V", Actuator Color=Black, Contact Resistance=100mR, Current Rating=50mA, Max Operating Temperature=70°C, Max Voltage Rating (DC)=12V, Min Operating Temperature=-20°C, Operating Force=160gf, Package Quantity=2000, Actuator Length=1.4mm, Actuator Material=Thermoplastic, Actuator Type=Standard, Color=Black, Contact Material=Bronze, Contact Plating=Silver, Electrical Life=100000Cycles, Illumination Type=Non-Illuminated, Mechanical Life=100000Cycles, Mount="Through Hole", Orientation=Straight, Packaging=Bulk, REACH SVHC="No SVHC", RoHS Compliant=Yes, Series=MJTP, Switch Function=Off-Mom, Switch Travel=0.25mm, Termination="PC Pin", Throw Configuration=SPST, Voltage Rating (DC)=12V
S1 S2 S3: "Switch", Manufacturer_Name="Omron Electronics", Mouser Part Number=653-B3F-5050, Arrow Part Number=B3F-5050, Arrow Price/Stock=https://www.arrow.com/en/products/b3f5050/omron?region=nac, Datasheet Link=https://omronfs.omron.com/en_US/ecb/products/pdf/en-b3f.pdf, Manufacturer_Part_Number=B3F-5050, Mouser Price/Stock=https://www.mouser.co.uk/ProductDetail/Omron-Electronics/B3F-5050?qs=dOLq8QE0Pqqk%2FO9x2OpTQw%3D%3D
U1: library part CMP-0095-00268-2, "8-bit AVR Microcontroller, 32KB Flash, 1KB EEPROM, 2KB SRAM, 32-pin TQFP, Industrial Grade (-40°C to 85°C), Reel", Code_JEDEC=MS-026-ABA, ComponentLink1Description="Manufacturer URL", ComponentLink1URL=http://www.atmel.com/, ComponentLink2Description="ATmega48A/48PA/88A/88PA/168A/168PA/328/328P Datasheet", ComponentLink2URL=http://www.atmel.com/dyn/resources/prod_documents/doc8271.pdf, ComponentLink3Description="ATmega48A/48PA/88A/88PA/168A/168PA/328/328P Summary", ComponentLink3URL=http://www.atmel.com/dyn/resources/prod_documents/8271S.pdf, DatasheetVersion="revD, May-2011", PackageDescription="32-Lead, 7x7x1.0 mm Body, 0.8mm Lead Pitch, Thin Profile Plastic Quad Flat Package (TQFP)", PackageReference=32A, PackageVersion="revC, Oct-2010", RevisionNote="DatasheetVersion & PackageVersion updated. URLs added."

## Free pads (board coordinates)
  round 1.524 hole 2: 13(57.328,39.192) 14(2.54,41.91) 15(19.05,62.23) 16(2.54,2.54) 17(57.353,2.591)

## Via types
v1: diameter 0.6, hole 0.3, Top Layer to Bottom Layer, 55 vias

## Nets (pads, with @x,y where several pads share a name; then routed paths per layer and width w, separated by ;. In a path a pad name is that pad's centre, name@x,y a point inside that pad or via, vN(x,y) a via of type N, cw(c..) or ccw(c..) an arc to the next point about the centre after c; other vN are vias at no path point)
+5V: "MQ2 Sensor.1" "Optical Dust Sensor.1" "PH Sensor.1" "TDS Sensor.2" "Turbisity Sensor.1" ASP.6 C2.1 C3.2 C4.1 C5.1 Display.3 LM7805.3 R1.2 R2.1 R10.1 S1.4 S2.4 S3.4 Temp.3 U1.4 U1.6 U1.18 | length 291.5
  Top Layer w0.3: R2.1@47.139,12.157 47.641,12.157 R1.2@50.424,14.94
  Top Layer w0.45: v1(19.05,27.153) 19.521,26.682 LM7805.3 21.59,25.732 20.168,24.31 C2.1 ; v1(20.168,47.549) 27.464,54.845 S2.4 ; 23.662,62.357 27.294,58.725 27.294,57.22 S2.4 ; S3.4 40.025,55.622 33.178,55.622 31.75,57.05 S2.4 ; R2.1 46.814,11.832 R2.1@47.139,12.157 ; R1.2@50.424,14.94 R1.2 51.024,14.94 54.062,11.902 57.116,11.902
  Bottom Layer w0.25: U1.4 26.854,14.053 28.169,15.367 ; U1.6 26.284,15.653 26.569,15.367 28.169,15.367 ; C5.1 46.709,15.062 C3.2 38.406,15.062 C4.1 37.902,15.241 36.691,16.453 U1.18 33.828,16.453 32.742,15.367 31.599,15.367 31.116,14.884 29.795,14.884 29.312,15.367 28.169,15.367
  Bottom Layer w0.45: 5.232,27.178 3.683,25.629 ASP.6 0.862,13.587 0.862,1.845 1.845,0.862 13.206,0.862 ; Display.3 13.206,0.862 ; v1(19.05,27.153) 19.05,36.17 20.168,37.287 v1(20.168,47.549) ; v1(38.43,55.601) 38.43,54.356 39.014,53.772 R10.1 ; 39.247,4.521 38.772,4.046 37.092,4.046 36.779,3.734 ; C5.1 53.827,15.191 57.116,11.902 ; 47.32,62.357 47.295,62.332 47.295,58.979 45.366,57.05 S3.4 42.881,55.622 53.73,55.622 S1.4 59.006,53.202 59.006,32.931 ; Temp.3 59.006,32.931 ; 13.206,0.862 21.36,0.862 24.232,3.734 36.779,3.734 ; 36.779,3.734 39.141,1.372 51.587,1.372 57.116,6.9 57.116,11.902 ; 57.116,11.902 59.006,13.792 59.006,32.931
A0: "Turbisity Sensor.2" U1.23 | length 30.7
  Top Layer w0.25: v1(40.538,11.024) 40.538,14.961 43.866,18.288 53.23,18.288 57.116,14.402
  Bottom Layer w0.25: U1.23 35.223,12.453 36.903,10.773 40.288,10.773 v1(40.538,11.024)
A1: "PH Sensor.4" U1.24 | length 15.6
  Bottom Layer w0.25: U1.24 34.492,11.653 34.72,11.424 34.72,11.381 37.904,8.197 43.071,8.197 46.747,4.521
A2: "Optical Dust Sensor.2" U1.25 | length 79
  Top Layer w0.25: v1(22.149,8.661) 27.61,8.661 28.6,9.652 30.505,9.652 v1(32.156,8.001)
  Bottom Layer w0.25: v1(22.149,8.661) 22.054,8.661 21.632,8.24 17.986,8.24 16.993,9.233 16.993,24.014 18.009,25.03 18.009,36.271 19.329,37.592 19.329,48.749 19.476,48.895 21.615,48.895 23.622,50.902 26.016,50.902 26.162,51.048 26.162,62.357 ; v1(32.156,8.001) 32.823,8.667 U1.25
A3: "MQ2 Sensor.3" U1.26 | length 103.2
  Top Layer w0.25: v1(33.731,9.195) 35.001,7.925 47.781,7.925 49.886,10.03 v1(49.886,10.033) ; v1(52.408,16.782) 52.408,15.004 v1(53.797,13.614)
  Bottom Layer w0.25: U1.26 32.023,10.703 32.55,11.23 33.041,11.23 33.731,10.539 v1(33.731,9.195) ; 42.32,62.357 39.294,59.331 39.294,56.21 41.3,54.204 41.3,47.65 50.749,47.65 52.73,45.669 52.73,38.617 53.442,37.906 53.442,26.899 49.174,22.631 45.136,22.631 44.679,22.174 44.679,16.782 v1(52.408,16.782) ; v1(49.886,10.033) 50.47,10.617 51.867,10.617 53.797,12.548 v1(53.797,13.614)
A4/SCL: Display.2 U1.27 | length 22.9
  Bottom Layer w0.25: Display.2 14.366,4.521 29.108,4.521 30.8,6.213 30.8,7.356 31.223,7.779 U1.27
A5/SDA: Display.1 U1.28 | length 24.3
  Bottom Layer w0.25: Display.1 12.526,5.182 25.166,5.182 ccw(c25.376,6.187) 25.398,5.16 28.543,5.226 30.423,7.106 U1.28
A6: U1.19
A7: U1.22
D0/RX: ASP.9 U1.30 | length 35.8
  Top Layer w0.25: v1(8.331,2.769) 11.201,5.639 v1(11.201,6.604)
  Bottom Layer w0.25: ASP.9 2.032,7.137 2.032,5.486 4.75,2.769 v1(8.331,2.769) ; v1(11.201,6.604) 22.581,6.604 23.47,7.493 26.413,7.493 28.823,9.903 U1.30
D1/TX: ASP.10 U1.31 | length 27.7
  Top Layer w0.25: v1(23.978,6.706) v1(25.324,8.052)
  Bottom Layer w0.25: ASP.10 5.402,4.529 9.965,4.529 9.982,4.547 11.024,4.547 12.446,5.969 23.292,5.969 23.978,6.655 v1(23.978,6.706) ; v1(25.324,8.052) 26.172,8.052 28.023,9.903 U1.31
D2: Temp.2 U1.32 | length 38.9
  Top Layer w0.25: v1(28.118,12.395) 28.143,12.395 29.616,13.868 v1(29.642,13.868) ; v1(32.156,14.707) 35.69,14.707 35.847,14.549 39.285,14.549 47.063,22.327 v1(51.664,22.327)
  Bottom Layer w0.25: v1(51.664,22.327) 51.7,22.363 52.081,22.363 55.651,25.933 55.651,27.076 Temp.2
  Bottom Layer w0.3: U1.32 27.223,11.5 v1(28.118,12.395) ; v1(29.642,13.868) 31.42,13.868 31.783,14.232 31.783,14.252 32.156,14.625 v1(32.156,14.707)
D3: "Optical Dust Sensor.4" U1.1 | length 58.1
  Top Layer w0.25: v1(21.438,16.231) 21.438,16.222 22.089,15.57 22.536,15.57 22.682,15.424 22.682,14.122 23.749,13.056 v1(23.749,11.659) ; v1(22.174,21.539) 22.174,23.067 26.035,26.927 v1(26.035,28.55)
  Bottom Layer w0.25: v1(21.438,16.231) 22.162,16.954 22.162,21.526 v1(22.174,21.539) ; v1(23.749,11.659) 23.752,11.656 25.87,11.656 U1.1 ; v1(26.035,28.55) 31.162,33.677 31.162,62.357
D4: "TDS Sensor.3" U1.2 | length 31.6
  Top Layer w0.25: 5.232,29.678 11.009,23.901 v1(12.268,23.901) ; v1(14.021,15.951) 19.101,15.951 v1(22.555,12.497)
  Bottom Layer w0.25: v1(12.268,23.901) 14.3,21.869 14.3,19.097 14.021,18.818 v1(14.021,15.951) ; v1(22.555,12.497) 22.577,12.475 25.851,12.475 U1.2
D5: "PH Sensor.6" U1.9 | length 33.2
  Top Layer w0.25: v1(28.067,16.18) 29.075,15.172 29.488,15.172 30.429,14.231 30.429,11.074 31.115,10.389 34.29,10.389 35.433,9.246 47.015,9.246 v1(47.041,9.271)
  Bottom Layer w0.25: U1.9 27.223,17.024 v1(28.067,16.18) ; v1(47.041,9.271) 47.041,9.249 51.747,4.543 51.747,4.521
D6: "PH Sensor.5" U1.10 | length 29
  Top Layer w0.25: v1(29.718,16.002) 30.259,15.461 30.539,15.461 31.013,14.986 31.013,12.573 32.487,11.1 34.9,11.1 36.043,9.957 v1(41.631,9.957)
  Bottom Layer w0.25: U1.10 28.023,18.203 29.651,16.574 29.651,16.069 v1(29.718,16.002) ; v1(41.631,9.957) 43.811,9.957 49.247,4.521
D7: R6.2 S2.1 U1.11 | length 32
  Top Layer w0.25: v1(29.286,20.65) 30.366,21.73 31.507,21.73 R6.2
  Bottom Layer w0.25: S2.1 22.464,26.456 28.823,20.098 ; U1.11 28.823,20.098 ; v1(29.286,20.65) 28.823,20.187 28.823,20.098
D8: R7.2 S3.1 U1.12 | length 39.3
  Top Layer w0.25: R7.2 38.4,21.77 v1(40.227,23.597) ; v1(38.329,28.245) 38.329,27.661 v1(39.522,26.467)
  Bottom Layer w0.25: U1.12 29.623,20.072 36.453,26.903 36.453,28.981 ; S3.1 36.453,28.981 ; v1(38.329,28.245) 37.19,28.245 36.453,28.981 ; v1(39.522,26.467) 40.227,25.763 v1(40.227,23.597)
D9: R8.2 S1.1 U1.13 | length 35.7
  Top Layer w0.25: v1(33.35,21.895) 34.699,21.895 R8.2
  Bottom Layer w0.25: U1.13 30.423,19.003 50.158,38.738 S1.1
D10: IRLZ44N.1@30.226,26.035 R5.2 U1.14 | length 27
  Top Layer w0.25: R5.2 27.563,22.507 IRLZ44N.1@30.226,25.17 ; IRLZ44N.1@30.226,26.035 IRLZ44N.1@30.226,25.17 ; v1(37.694,24.105) 37.599,24.105 37.218,23.724 34.139,23.724 33.607,24.255 31.141,24.255 IRLZ44N.1@30.226,25.17
  Bottom Layer w0.25: U1.14 31.223,19.003 32.616,20.396 36.303,20.396 36.685,20.779 36.685,23.574 36.862,23.751 37.245,23.751 37.599,24.105 v1(37.694,24.105)
D11: IRLZ44N.1@43.815,26.035 R9.2 | length 17.8
  Top Layer w0.25: R9.2 28.088,21.694 29.635,23.241 38.024,23.241 40.818,26.035 IRLZ44N.1@43.815,26.035
D11/MOSI: ASP.1 U1.15 | length 27.9
  Top Layer w0.25: ASP.1 10.624,16.408 12.297,18.081 26.744,18.081 27.151,17.674 30.408,17.674 v1(31.013,17.069)
  Bottom Layer w0.25: v1(31.013,17.069) 31.013,17.193 32.023,18.203 U1.15
D12/MISO: ASP.5 R3.2 U1.16 | length 37.9
  Top Layer w0.25: ASP.5 6.248,6.248 10.541,10.541 v1(10.566,10.541) 10.566,15.817 12.046,17.297 29.693,17.297 v1(30.988,16.002)
  Bottom Layer w0.25: v1(10.566,10.541) 10.566,12.063 R3.2 ; v1(30.988,16.002) 32.419,17.433 32.419,17.799 32.823,18.203 U1.16
D13/SCK: ASP.4 Buzzer.1 R4.1 U1.17 | length 101.1
  Top Layer w0.25: ASP.4 6.499,9.064 7.693,9.064 v1(8.636,10.008) ; v1(14.986,11.049) 28.118,11.049 v1(29.413,12.344) ; v1(31.826,12.548) 31.826,13.921 31.427,14.321 31.427,15.323 v1(32.334,16.231) ; R4.1 43.942,14.863 v1(43.942,17.221) ; v1(52.527,31.445) 52.527,37.922 58.458,43.853 58.458,55.521 54.254,59.724 Buzzer.1
  Bottom Layer w0.25: v1(8.636,10.008) 8.655,9.989 13.926,9.989 v1(14.986,11.049) ; v1(29.413,12.344) 31.528,12.344 31.731,12.548 v1(31.826,12.548) ; v1(32.334,16.231) 32.334,16.325 32.755,16.746 32.755,16.931 33.077,17.253 U1.17 43.911,17.253 v1(43.942,17.221) 43.942,22.428 44.907,23.393 48.768,23.393 52.476,27.102 52.476,31.394 v1(52.527,31.445)
DGND: Display.4 IRLZ44N.2@32.766,37.465 | length 90.2
  Top Layer w0.25: Display.4 18.299,1.941 17.247,0.889 1.6,0.889 0.864,1.626 0.864,34.747 8.788,42.672 26.289,42.672 31.496,37.465 IRLZ44N.2@32.766,37.465
GND: 13.1 "MQ2 Sensor.2" "Optical Dust Sensor.3" "Power In.1" ASP.7 ASP.8 Buzzer.2 C1.2 C2.2 C3.1 C4.2 C5.2 C6.1 C7.1 C8.2 C9.2 IRLZ44N.3 LED.1 LM7805.4 PWR.1 R5.1 R6.1 R7.1 R8.1 R9.1 RESET.4 Temp.1 U1.3 U1.5 U1.21 | length 386.5
  Top Layer w0.25: C8.2@12.918,8.616 13.32,9.019 C8.2 13.371,9.22 C7.1 ; v1(54.686,6.934) 58.801,6.934
  Top Layer w0.4: ASP.8 2.362,11.328 1.905,10.871 1.905,5.156 2.896,4.166 6.375,4.166 10.826,8.616 ; C8.2@12.918,8.616 10.826,8.616 ; 28.662,62.357 29.765,63.46 43.717,63.46 44.82,62.357 46.036,63.573 55.564,63.573 Buzzer.2 56.979,62.158 58.135,62.158 59.454,60.838 59.454,28.379 Temp.1 57.048,18.53 59.006,16.572 59.006,7.14 58.801,6.934 54.407,2.54 47.362,2.54 46.956,2.134 34.696,2.134 33.781,3.048 26.737,3.048 RESET.4 21.094,5.969 13.473,5.969 10.826,8.616 ; IRLZ44N.3@35.306,26.035 35.306,26.9 37.718,29.312 47.473,29.312 48.108,28.677 48.108,26.822 IRLZ44N.3@48.895,26.035
  Top Layer w0.45: ASP.8 ASP.7 1.956,15.596 1.956,20.915 ; LM7805.4 15.94,40.067 8.712,40.067 1.956,33.31 1.956,20.915 ; IRLZ44N.3@48.895,26.035 48.895,25.17 45.42,21.695 C6.1 41.129,21.27 40.8,21.27 38.4,18.87 R7.1 38.087,18.857 34.861,18.857 R8.1 R6.1 31.496,18.819 27.813,18.819 R9.1 26.177,18.794 25.604,19.367 24.319,19.367 R5.1 24.067,19.594 20.18,19.594 C2.2 16.151,19.582 C1.2 11.841,19.757 LED.1 6.308,20.904 6.055,20.652 2.219,20.652 1.956,20.915
  Bottom Layer w0.25: U1.5 25.42,14.853 24.87,14.302 24.87,13.803 25.42,13.253 U1.3 31.464,13.253 32.264,14.053 U1.21 36.091,14.053 37.902,12.241 C4.2 42.343,12.241 C3.1 46.686,12.342 C5.2 47.084,11.944 47.084,11.387 49.746,8.725 49.746,7.937 v1(49.759,7.925) 52.146,7.925 53.137,6.934 v1(54.686,6.934)
  Bottom Layer w0.4: 17.393,56.676 17.393,63.952 17.627,64.186 26.833,64.186 28.662,62.357 ; 17.418,56.651 18.491,55.577 20.768,53.3 C9.2
  Bottom Layer w0.45: 8.712,40.067 14.286,40.067 18.491,44.272 18.491,55.577 ; 17.418,56.651 17.418,56.676 ; PWR.1 45.75,21.298 49.399,21.298 13.1 52.377,21.302 Temp.1
NetC6_2: C6.2 U1.20 | length 9.8
  Top Layer w0.25: v1(35.865,15.646) 37.49,17.272 40.564,17.272 40.719,17.428 40.719,18.55 41.244,19.075 C6.2
  Bottom Layer w0.25: U1.20 35.071,14.853 v1(35.865,15.646)
NetC7_2: 16MHz.1 C7.2 U1.8 | length 12.6
  Top Layer w0.25: C7.2 16.129,13.411 16.688,13.97 18.337,13.97 16MHz.1
  Bottom Layer w0.25: 16MHz.1 20.456,13.972 23.737,17.253 U1.8
NetC8_1: 16MHz.2 C8.1 U1.7 | length 14.8
  Top Layer w0.3: C8.1 14.85,9.092 16MHz.2
  Bottom Layer w0.25: 16MHz.2@18.491,9.244 18.491,10.236 24.708,16.453 U1.7
  Bottom Layer w0.3: 16MHz.2 16MHz.2@18.491,9.244
NetC9_1: "Optical Dust Sensor.6" C9.1 R10.2 | length 29.4
  Top Layer w0.303: v1(29.413,48.641) v1(35.103,48.641)
  Bottom Layer w0.303: C9.1 28.992,48.3 29.333,48.641 v1(29.413,48.641) ; v1(35.103,48.641) 38.758,48.641 R10.2 38.889,48.897 38.416,49.371 38.416,49.496 37.356,50.555 37.356,56.038 37.379,56.061 ccw(c36.453,57.05) 37.411,58.008 37.262,58.157 37.262,58.28 37.262,61.257 36.162,62.357
NetD1_2: PWR.2 R2.2 | length 8.4
  Top Layer w0.25: R2.2@43.914,11.832 45.415,13.332 v1(45.415,17.475)
  Top Layer w0.45: R2.2 R2.2@43.914,11.832
  Bottom Layer w0.25: v1(45.415,17.475) 45.415,18.864 PWR.2
NetD4_2: 13.2 R4.2 | length 6.1
  Top Layer w0.2: R4.2@47.163,15.484 48.225,15.484 49.425,16.684 v1@49.425,17.446
  Top Layer w0.45: R4.2 46.838,15.159 R4.2@47.163,15.484 ; v1@49.425,17.446 v1(49.454,17.475)
  Bottom Layer w0.2: 13.2 49.454,19.152 v1(49.454,17.475)
NetDS1_2: LED.2 R3.1 | length 3.4
  Bottom Layer w0.3: R3.1@10.693,15.09 LED.2
  Bottom Layer w0.45: R3.1 R3.1@10.693,15.09
RESET: ASP.3 R1.1 RESET.1 U1.29 | length 60.2
  Top Layer w0.25: v1(22.038,7.544) 24.422,5.16 27.575,5.16 28.602,6.187 RESET.1 ; v1(29.007,8.839) 29.007,6.528 29.312,6.223 31.84,6.223 RESET.1 ; R1.1 50.724,6.649 50.577,6.502 32.191,6.502 RESET.1
  Bottom Layer w0.25: ASP.3 8.992,8.56 13.808,8.56 14.824,7.544 v1(22.038,7.544) ; v1(29.007,8.839) 29.074,8.906 29.276,8.906 29.623,9.253 U1.29
VIN: "Power In.2" C1.1 LM7805.1 | length 19.5
  Top Layer w0.45: 8.712,37.567 8.712,33.045 15.076,26.682 LM7805.1 16.51,23.165 15.977,22.632 C1.1
WGND: "PH Sensor.2" "PH Sensor.3" "TDS Sensor.1" "Turbisity Sensor.3" IRLZ44N.2@46.355,37.465 | length 97.3
  Top Layer w0.3: v1(16.586,30.226) 37.846,30.226 45.085,37.465 46.355,37.465 48.712,35.108 48.712,32.746 52.73,28.727 52.73,21.288 57.116,16.902 57.256,16.762 57.256,15.752 58.369,14.638 58.369,10.768 58.193,10.592 56.032,10.592 51.13,5.69 45.415,5.69 44.247,4.521 41.747,4.521
  Bottom Layer w0.3: 5.232,24.678 10.806,30.251 16.561,30.251 v1(16.586,30.226)
pads on no net: "Optical Dust Sensor.5" "Power In.MH1" ASP.2 Buzzer.MH1 Display. RESET.2 RESET.3 S1.2 S1.3 S1.5 S1.6 S2.2 S2.3 S2.5 S2.6 S3.2 S3.3 S3.5 S3.6

## Silkscreen, mask and mechanical layers (free items; w line width, h text height)
Bottom Overlay:
  drawing of 34 lines, arcs and shapes, not listed
  text "PWR" at 52.449,19.252 h0.4 r270
  text "32d8fee5623376093e0058c22a75eaf0816b28b4ef2f2f8685ef0b67d02e1279" at 0.557,3.707 h0.6 r270
Mechanical 1:
  lines w0.152: 59.995,0 0,0 0,45.009 16.993,45.009 16.993,65.009 59.995,65.09 ; 60.071,0 60.071,65.09